# EAGLE board einstein_v1 (EAGLE 8.4.1)

Size 160 x 100 mm. Coordinates in mm from the lower left corner, seen from the top.
Outline: 0,0 160,0 160,100 0,100 0,0
Copper layers (1*16): Top 0.035mm / dielectric 1.5mm / Bottom 0.035mm
Design rules "default *": minimum track width 10mil, minimum drill 24mil, track to track 8mil, track to pad 8mil, pad to pad 8mil, via to via 8mil, smd to smd 8mil, copper to edge 40mil, drill to drill 8mil, minimum pad ring 10mil, minimum via ring 8mil, stop-mask expansion 4mil, vias tented up to drill 0mil, thermal gap 10mil

## Footprints (pad centres in the part's own frame; a part is rotated, then mirrored left to right if it is on the bottom)
1206 = smd 1.6 x 1.8: 1 -1.4,0; 2 1.4,0
0603-CAP = smd 1.1 x 1: 1 -0.85,0; 2 0.85,0
EIA3216 = smd 1.4 x 1.6: A 1.4,0; C -1.4,0
MOLEX_52892-1695 = smd 0.305 x 1.397: 1 3.759,2.896; 2 3.251,2.896; 3 2.743,2.896; 4 2.261,2.896; 5 1.753,2.896; 6 1.245,2.896; 7 0.762,2.896; 8 0.254,2.896; 9 -0.254,2.896; 10 -0.762,2.896; 11 -1.245,2.896; 12 -1.753,2.896; 13 -2.261,2.896; 14 -2.743,2.896; 15 -3.251,2.896; 16 -3.759,2.896 | smd 1.6 x 2.21: 17 -6.401,5.359; 18 6.401,5.359
R0201 = smd 0.28 x 0.43: 1 -0.255,0; 2 0.255,0
SO08-EIAJ = smd 0.61 x 2.21: 1 -1.905,-3.378; 2 -0.635,-3.378; 3 0.635,-3.378; 4 1.905,-3.378; 5 1.905,3.353; 6 0.635,3.353; 7 -0.635,3.353; 8 -1.905,3.353
0603 = smd 1.1 x 1: 1 -0.85,0; 2 0.85,0
NT3H1101 = smd 0.55 x 0.35: 1 -2.175,0.975; 2 -2.175,0.325; 3 -2.175,-0.325; 4 -2.175,-0.975; 5 2.175,-0.975; 6 2.175,-0.325; 7 2.175,0.325; 8 2.175,0.975; P$5 -2.175,-0.325
LGA14_1:1_PATRICK = smd 0.5 x 1.124: 1 2,1.138; 2 1.2,1.138; 3 0.4,1.138; 4 -0.4,1.138; 5 -1.2,1.138; 6 -2,1.138; 8 -2,-1.13; 9 -1.2,-1.138; 10 -0.4,-1.138; 11 0.4,-1.138; 12 1.2,-1.138; 13 2,-1.138 | smd 1.124 x 0.5: 7 -2.1,0; 14 2.1,0

## Placement (x,y rotation side)
C1  0.2uf  [1206]  8.64,15.75 180 top
C2  0.1uF  [0603-CAP]  8.38,20.07 180 top
C3  10uF  [EIA3216]  8.64,17.27 0 top
CIO  0.1uF  [0603-CAP]  8.38,21.08 180 top
EINK  52892-1695  [MOLEX_52892-1695]  6.35,8.89 180 top
J1  0ohm  [R0201]  0.51,19.05 270 top
MCU  Tiny85-20-SMT  [SO08-EIAJ]  3.17,12.06 0 top
R4  470  [0603]  9.91,8.89 270 top
R5  470  [0603]  8.38,8.89 270 top
R6  10k  [0603]  6.99,8.89 270 top
U1  [NT3H1101]  8.64,12.7 0 top
U2  ADXL345PATRICK  [LGA14_1:1_PATRICK]  3.3,20.07 180 top

## Library data of the parts
C1 = SparkFun-Capacitors
C2 C3 CIO = SparkFun
EINK = Molex_By_element14_Batch_1; MPN: 52892-1695; OC_FARNELL: 1556807; OC_NEWARK: 92M6601; PACKAGE: CONNECTOR, FPC, ZIF, 0.50MM, 16 WAY; SUPPLIER: Molex
J1 = resistor
MCU = SparkFun-DigitalIC; PROD_ID: IC-09092
R4-R6 = microbuilder
U1 = AlterNail
U2 = Testing

## Nets
CLOCK: MCU.7 R5.1 U1.3 U2.14
COIL: U1.1 U1.8
DATA: MCU.5 R4.1 U1.5 U2.13
DOT1: EINK.3 MCU.3
DOT5: EINK.7 MCU.6
FD: R6.1 U1.4
GND: C1.2 C2.2 C3.C CIO.2 EINK.2 EINK.4 EINK.5 EINK.6 J1.2 MCU.4 U1.2 U2.2 U2.4 U2.5
RST: EINK.1 MCU.2
SDO: J1.1 U2.12
VCC: C1.1 C2.1 C3.A CIO.1 MCU.8 R4.2 R5.2 R6.2 U1.6 U1.7 U2.1 U2.6 U2.7

## Tracks (layer width: path | path; a pad name or v marks a point on that pad's centre or on a via)
CLOCK  (3 unrouted)
COIL  (1 unrouted)
DATA  (3 unrouted)
DOT1  (1 unrouted)
DOT5  (1 unrouted)
FD  (1 unrouted)
GND  (13 unrouted)
RST  (1 unrouted)
SDO  (1 unrouted)
VCC  (12 unrouted)